# Altium PCB MS5837 V2.0.PcbDoc
Units mil, origin at the board's own origin, x right, y up, seen from the top; angles counter-clockwise.
Board outline 511.81 x 511.81 mil, 2 copper layers (Top Layer, Bottom Layer); 11 components, 14 nets, 50 pads, 11 vias.
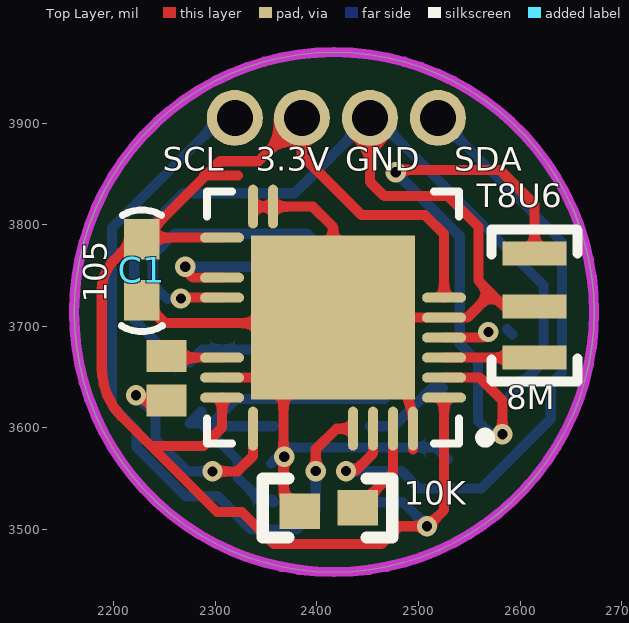
[diagram p0: Top Layer view]
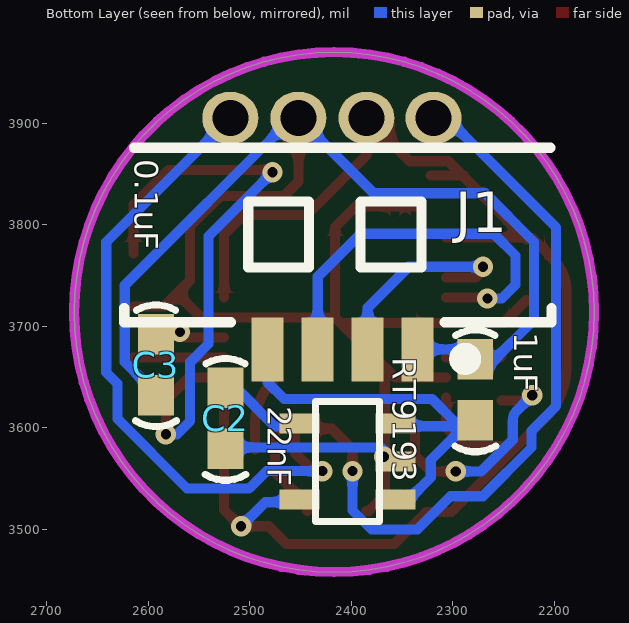
[diagram p1: Bottom Layer view, seen from below]
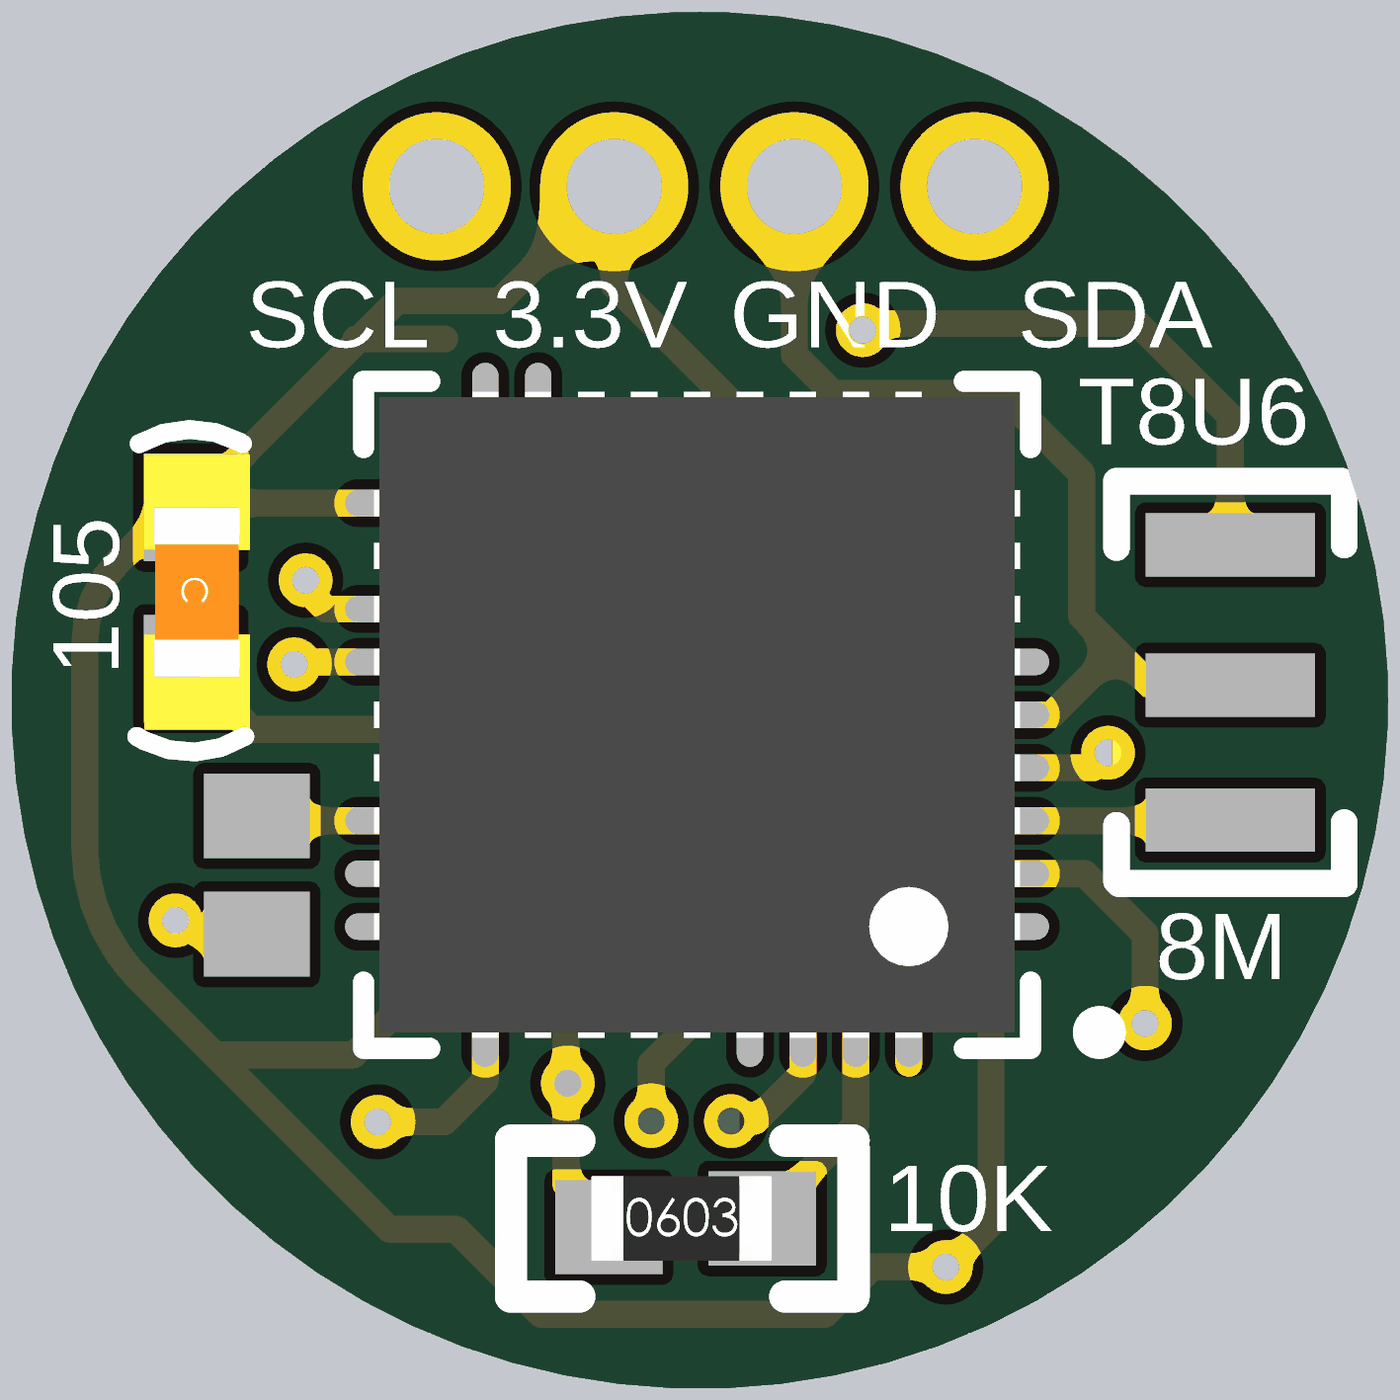
[diagram p2: 3D render of the assembled board from above, using the file's embedded part models]
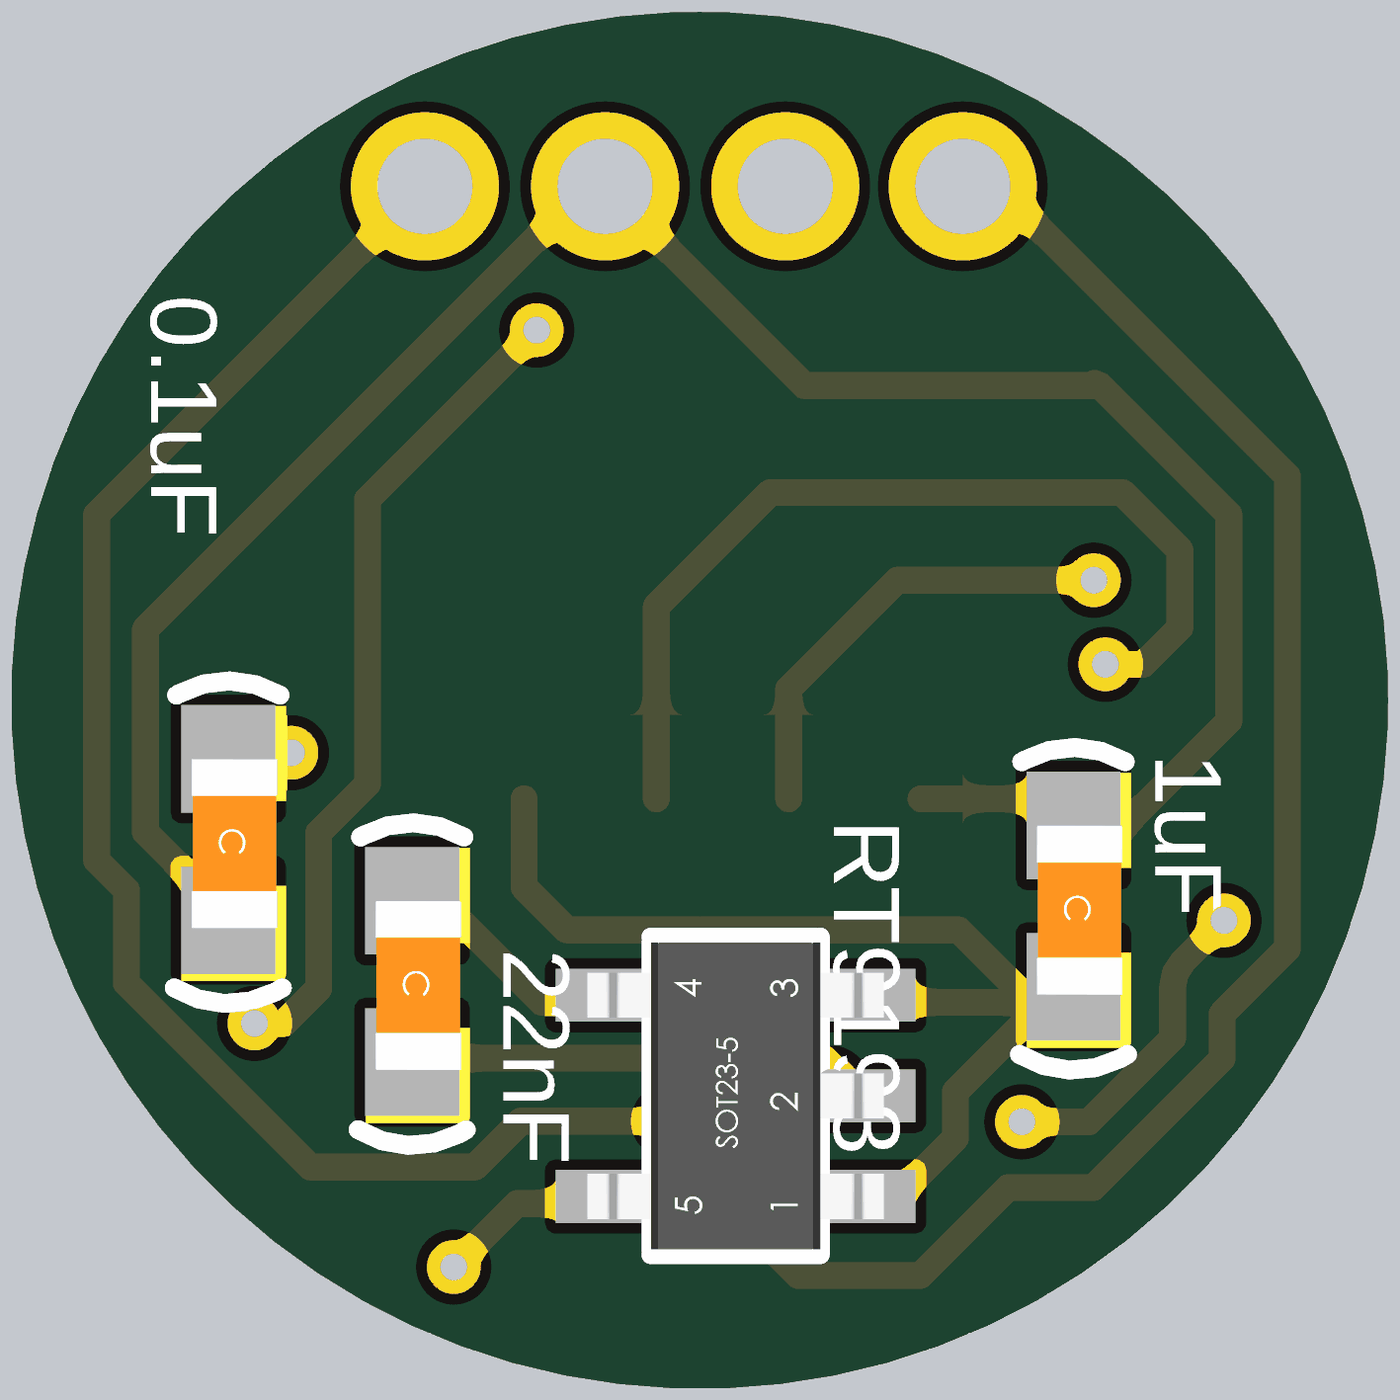
[diagram p3: 3D render of the assembled board from below, using the file's embedded part models]

## Layer stack, top to bottom
Top Solder: solder mask 0.4, Solder Resist, Dk 3.5
Top Layer: signal copper 1.4
Dielectric 1: dielectric 12.6, FR-4, Dk 4.8
Bottom Layer: signal copper 1.4
Bottom Solder: solder mask 0.4, Solder Resist, Dk 3.5

## Board outline
2417,3458.09 cw(c2417,3714) 2161.09,3714 cw(c2417,3714) 2417,3969.91 cw(c2417,3714) 2672.91,3714 cw(c2417,3714)

## Design rules (kind name [scope] priority, off if disabled: settings)
Clearance [All] p1: gap=8
PolygonConnect [All] p1: connectstyle=Relief reliefconductorwidth=10 reliefentries=4 polygonreliefangle="90 Angle" airgapwidth=10
RoutingVias [All] p1: holewidth=28 width=50 viastyle="Through Hole" minholewidth=28 minwidth=50 maxholewidth=28 maxwidth=50
SolderMaskExpansion [All] p1: expansion=4
Width [All] p1: maxlimit=10 minlimit=10 preferedwidth=10
30 further rules are at their usual default settings.

## Classes and differential pairs
component class Sheet1: 1uF 10K C1 C2 J1 R2 STM32T8U6 T8U6

## Components (designator, comment, footprint, x,y, rotation, side; value= is the part's Value field where it differs from the comment)
1uF "1uF" 0603C 1996.02,3570.45 r270 bottom (schematic designator C4)
8M "8M_XT_SMD3" 三脚贴片8M晶振1.5*3.5 2685.19,3667.47 r90 top (schematic designator XT1)
10K "10K" 0603R 2382.21,3522.25 r0 top (schematic designator R2)
C1 "105" 0603C 2509.75,3688.7 r270 top
C2 "22nF" 0603C 2241.93,3542.44 r270 bottom
C3 "0.1uF" 0603C 2310.32,3595.2 r270 bottom
J1 "MX1.25-4P" MX1.25-4P -560.93,4603.02 r180 top
RT9193 "RT9193" RT9193 2356.43,3529.48 r270 bottom (schematic designator U2)
T8U6 "STM32F103T8U6" QFN-36B6R00x6R00 2416,3708.57 r180 top locked (schematic designator U1)
U3 "连接端子" 连接端子 2419.07,3862.13 r0 top
U4 "SWD下载口" SWD下载口 2222.26,3629.99 r180 top

## Footprints (in the part's own frame and the unit in brackets; to place one, negate y for a bottom-side part, rotate by r counter-clockwise, add the part's x,y. Pads: shape width x height; smd on the part's side, far side on the other; paste and mask are expansions set on the pad)
0603C [mil]
  rect 40x35 smd: 1(-97,-282) 2(-37,-282)
  silkscreen extent -126,-302 -6,-262, body extent -117,-299 -14,-260, height 35
0603R [mil]
  rect 40x35 smd: 1(0.97,-4.2) 2(58,-1)
  silkscreen extent -35,-30 92,28, body extent -5,-17 61,15, height 22
MX1.25-4P [mm]
  rect 2x0 smd far side: 0(-80.07,20.701)
  rect 0x0 smd far side: 0(-70.806,20.701)
  rect 0.8x1.6 smd far side: 1(-73.549,23.512) 2(-74.799,23.512) 3(-76.049,23.512) 4(-77.299,23.512)
  body extent -80.44,18.74 -70.29,23.93, height 3.4
QFN-36B6R00x6R00 [mm] "QFN, 36-Leads, Body 6.00x6.00mm, Pitch 0.50mm, Thermal Pad 4.10x4.10mm, IPC Medium Density"
  oval 1.1x0.25 smd: 1(-2.775,2) 2(-2.775,1.5) 3(-2.775,1) 4(-2.775,0.5) 5(-2.775,0) 6(-2.775,-0.5) 19(2.775,-2) 21(2.775,-1) 22(2.775,-0.5) 25(2.775,1) 26(2.775,1.5) 27(2.775,2)
  oval 0.25x1.1 smd: 17(1.5,-2.775) 18(2,-2.775) 28(2,2.775) 33(-0.5,2.775) 34(-1,2.775) 35(-1.5,2.775) 36(-2,2.775)
  rect 4.1x4.1 smd: 37(0,0)
  silkscreen extent -3.93,-3.15 3.15,3.15, body extent -3.05,-3.05 3.05,3.05, height 0.9
RT9193 [mm]
  rect 0.5x1 smd: 1(0,0) 2(-0.95,0) 3(-1.9,0) 4(-1.9,-2.4) 5(0,-2.4)
  silkscreen extent -2.45,-2 0.55,-0.4, body extent -2.4,-2.6 0.5,0.2, height 1.09
SWD下载口 [mil]
  rect 39.37x31.5 smd: 1(-30,3) 2(-30,-41)
三脚贴片8M晶振1.5*3.5 [mm]
  rect 0.6x1.6 smd: 1(0.05,1.8) 2(2.65,1.8) 3(1.325,1.8)
  silkscreen extent -0.55,0.73 3.25,2.87
连接端子 [mm]
  round 1.4 / inner oval 1.4x1.3 / far side oval 1.4x1.3 hole 0.9 mask+0.102: 1(-2.537,1.091) 2(-0.86,1.091) 3(0.842,1.091) 4(2.543,1.091)

## Part data
1uF C1 C2 C3: library part Cap1, "无极贴片电容"
8M: library part 8M_XT-SMD3
10K: library part Res, "电阻"
J1: library part MX1.25-4P_1

## Via types
v1: diameter 20, hole 10, Top Layer to Bottom Layer, 11 vias

## Nets (pads, with @x,y where several pads share a name; then routed paths per layer and width w, separated by ;. In a path a pad name is that pad's centre, name@x,y a point inside that pad or via, vN(x,y) a via of type N, cw(c..) or ccw(c..) an arc to the next point about the centre after c; other vN are vias at no path point)
3.3V: C1.1 RT9193.5 T8U6.1 T8U6.6 T8U6.19 T8U6.27 U3.2 | length 1445.5
  Top Layer w10: 2200.97,3765.83 ccw(c2231.68,3735.15) 2188.27,3735.15 2188.27,3659.67 ccw(c2258.21,3659.67) 2200.66,3619.92 ccw(c2258.21,3659.67) 2208.76,3610.22 2301.72,3517.25 2326.4,3517.25 2358,3485.66 2463.66,3485.66 2481.32,3503.31 2509.29,3503.31 2525.25,3519.27 T8U6.1 ; 2200.99,3765.84 C1.1@2222.19,3787.05 ; C1.1 C1.1@2229.35,3787.31 ; 2239.81,3582.14 2288.17,3582.14 2306.74,3600.71 T8U6.27 ; 2289.16,3848.33 2290.37,3848.33 ; T8U6.19 C1.1@2229.35,3787.31 ; 2322.16,3848.33 2290.37,3848.33 ; T8U6.6 2525.25,3790.62 2506.44,3809.43 2444.17,3809.43 2385.2,3868.39 U3.2 2342.63,3862.53 2304.57,3862.53 2290.37,3848.33 ; C1.1@2229.35,3787.31 2290.37,3848.33
  Bottom Layer w10: RT9193.5@2452.25,3526.85 2484.88,3526.85 v1(2508.49,3503.24)
GND: 1uF.1 8M.3 10K.1 C1.2 C2.2 C3.2 J1.1 RT9193.2 T8U6.5 T8U6.17 T8U6.18 T8U6.26 T8U6.36 T8U6.37 U3.3 | length 2241.7
  Top Layer w10: C1.2 2250.29,3703.16 T8U6.37@2410.59,3703.16 ; T8U6.26 2356.94,3649.51 T8U6.37@2365.16,3657.73 ; T8U6.18 T8U6.17 2396.04,3817.82 2416,3797.86 T8U6.37 ; 10K.1@2385.63,3518.06 10K.1 2367.22,3534.02 2367.22,3659.79 T8U6.37@2410.59,3703.16 ; U3.3 2452.2,3842.41 2466.47,3828.14 2529.15,3828.14 2558.98,3798.32 2558.98,3745.16 2571.74,3732.4 ; T8U6.37@2477.42,3645.98 cw(c2435.61,3604.17) 2494.74,3604.17 T8U6.36 T8U6.36@2494.74,3578.97 ; 8M.3 2584.5,3719.63 2571.74,3732.4 ; T8U6.37@2410.59,3703.16 T8U6.37 ; T8U6.37 T8U6.5 2547.91,3708.57 2571.74,3732.4
  Bottom Layer w10: 2270.18,3831.82 cw(c2268.3,3833.7) 2268.3,3831.04 ; J1.1 2287.57,3677.36 2274.53,3664.33 2262.2,3664.33 2220.23,3706.3 2220.23,3782.98 2268.3,3831.04 ; RT9193.2@2355.11,3564.98 2371.02,3580.89 2516.89,3580.89 C2.2@2528.81,3568.97 ; C3.2@2589.52,3629.68 2589.52,3631.28 2623.13,3664.89 2623.13,3740.38 2458.42,3905.1 U3.3 2378.15,3831.04 2268.3,3831.04
  other v1: 2367.93,3571.57
NetC2_1: C2.1 RT9193.4 | length 87.3
  Bottom Layer w10: RT9193.4@2452.25,3601.65 2475.64,3601.65 2513.43,3639.44 C2.1
NetR2_2: 10K.2 T8U6.35 | length 97.4
  Top Layer w10: 10K.2 10K.2@2441.86,3522.91 ; 10K.2@2443.43,3518.26 2443.21,3518.91 2442.2,3521.92 10K.2@2441.87,3522.9 ; T8U6.35 2475.05,3556.09 10K.2@2441.86,3522.91
NetU1_2: 8M.2 T8U6.2 | length 604.8
  Top Layer w10: v1@2479.21,3854.03 2579.98,3854.03 2614.32,3819.69 8M.2 ; T8U6.2 2560.2,3649.51 2582.58,3627.13 v1(2582.58,3593.82)
  Bottom Layer w10: v1(2477.62,3851.64) 2540.58,3788.68 2540.58,3682.89 2558.69,3664.78 2558.69,3606.85 2571.72,3593.82 v1(2582.58,3593.82)
NetU1_3: 8M.1 T8U6.3 | length 89.2
  Top Layer w10: T8U6.3 2614.08,3669.2 8M.1
NRST: C3.1 T8U6.4 | length 52.8
  Top Layer w10: T8U6.4 2563.23,3688.88 v1(2568.82,3694.47)
  Bottom Layer w10: C3.1@2587.41,3697.11 C3.1
RX1: J1.3 T8U6.22 | length 395.7
  Top Layer w10: v1@2266.47,3726.77 2267.96,3728.25 T8U6.22
  Bottom Layer w10: v1(2266.18,3727.36) 2252.06,3727.36 2238.43,3741 2238.43,3769.77 2259.87,3791.21 2390.83,3791.21 2433.14,3748.9 J1.3
SCL: T8U6.33 U3.1 | length 714.7
  Top Layer w10: v1(2398.96,3557.5) 2398.96,3578.97 2419.3,3599.31 T8U6.33
  Bottom Layer w10: U3.1 2306.3,3905.1 2198.49,3797.28 2198.49,3621.61 2222.73,3597.37 2222.73,3580.79 2270.77,3532.74 2302.38,3532.74 2335.07,3500.05 2380.2,3500.05 2398.96,3518.82 v1(2398.96,3557.5)
SDA: T8U6.34 U3.4 | length 659.6
  Top Layer w10: v1(2428.61,3557.5) 2437.64,3557.5 2455.37,3575.22 T8U6.34
  Bottom Layer w10: v1(2428.61,3557.5) 2483.53,3557.5 2500.61,3540.42 2561.76,3540.42 2630.24,3608.89 2630.24,3643.43 2641.31,3654.5 2641.31,3782.99 U3.4 U3.4@2519.2,3892.14
SWCLK: T8U6.28 U4.1 | length 224.8
  Top Layer w10: v1(2222.06,3632.12) ccw(c2234.46,3644.52) 2234.46,3626.99 U4.1 ; v1(2297.22,3557.23) 2321.98,3557.23 2337.26,3572.51 T8U6.28
  Bottom Layer w10: v1(2222.06,3632.12) 2237.21,3616.98 cw(c2227.67,3607.44) 2241.16,3607.44 2241.16,3588.36 2272.29,3557.23 v1(2297.22,3557.23)
SWDIO: T8U6.25 U4.2 | length 55.2
  Top Layer w10: U4.2 2254.06,3669.2 T8U6.25
TX1: J1.2 T8U6.21 | length 210.1
  Top Layer w10: v1@2270.74,3755.19 2277.99,3747.94 T8U6.21
  Bottom Layer w10: v1(2270.44,3758.63) 2343.54,3758.63 2383.92,3718.25 J1.2
VCC: 1uF.2 J1.4 RT9193.1 RT9193.3 | length 453.3
  Bottom Layer w10: 1uF.2@2286.24,3616.03 2274.53,3604.33 2281.15,3604.33 1uF.2 2282.92,3607.45 1uF.2@2288.72,3601.65 ; 2296.56,3604.33 2320.82,3628.59 2466.37,3628.59 2482.35,3644.57 J1.4 ; RT9193.1@2344.78,3528.35 2321.9,3551.24 2321.9,3568.47 1uF.2@2288.72,3601.65 ; RT9193.1@2345.91,3529.48 RT9193.1 ; RT9193.1@2356.43,3526.85 RT9193.1@2357.76,3526.85 ; RT9193.3@2357.76,3601.65 1uF.2@2288.72,3601.65
pads on no net: J1.0

## Keep-outs
Keep-Out Layer:
  circle w10: c2417,3714 r255.91

## Silkscreen, mask and mechanical layers (free items; w line width, h text height)
Top Overlay:
  text "SCL" at 2248.16,3845.33 h40
  text "3.3V" at 2339.91,3845.33 h40
  text "GND" at 2428.16,3845.33 h40
  text "SDA" at 2535.16,3845.33 h40